# EAGLE board bs_usb_output (EAGLE 9.2.0)
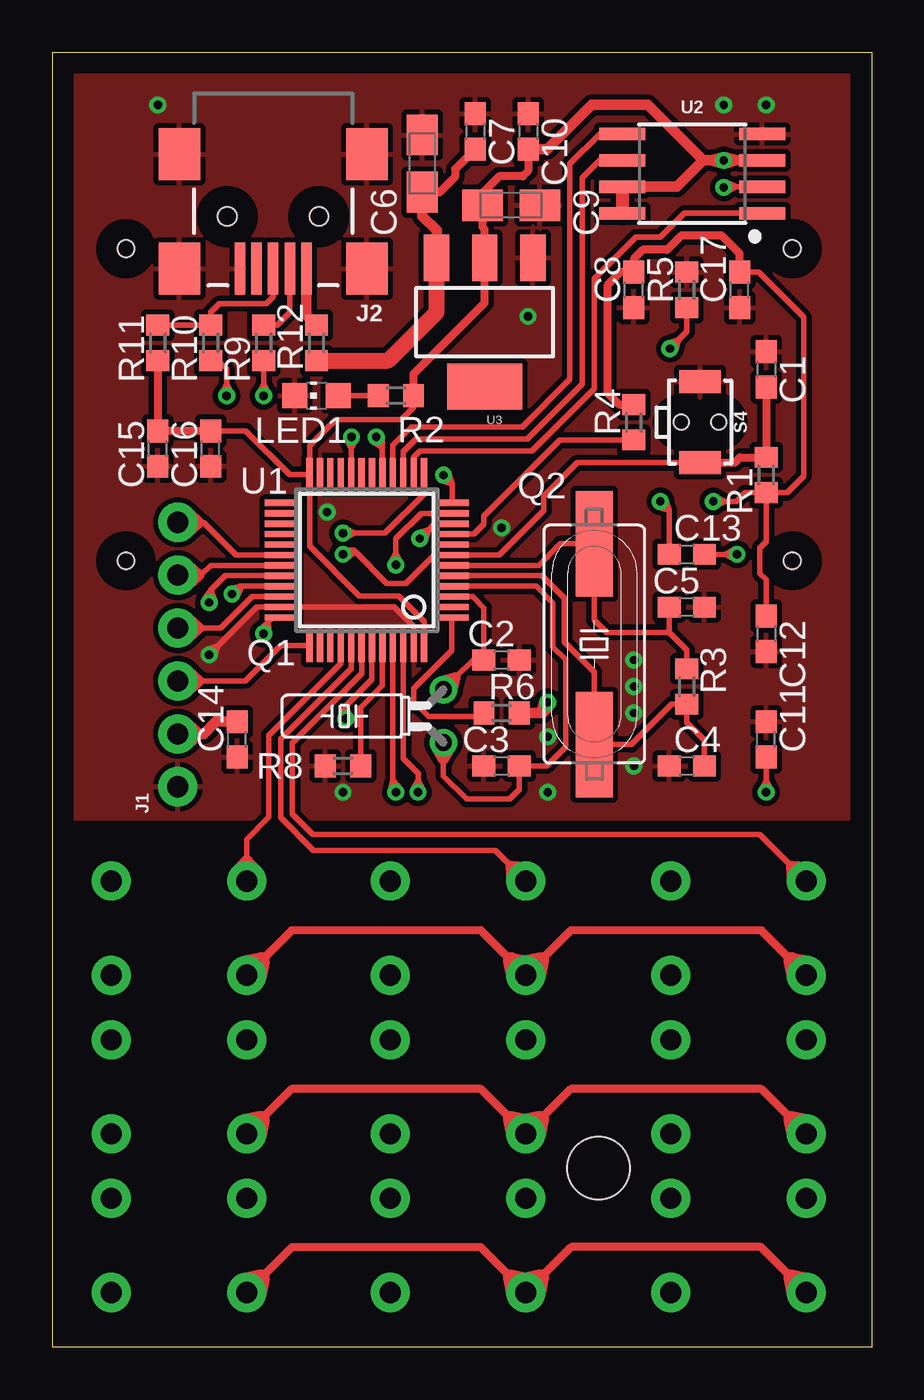
[diagram p0: board, top side]
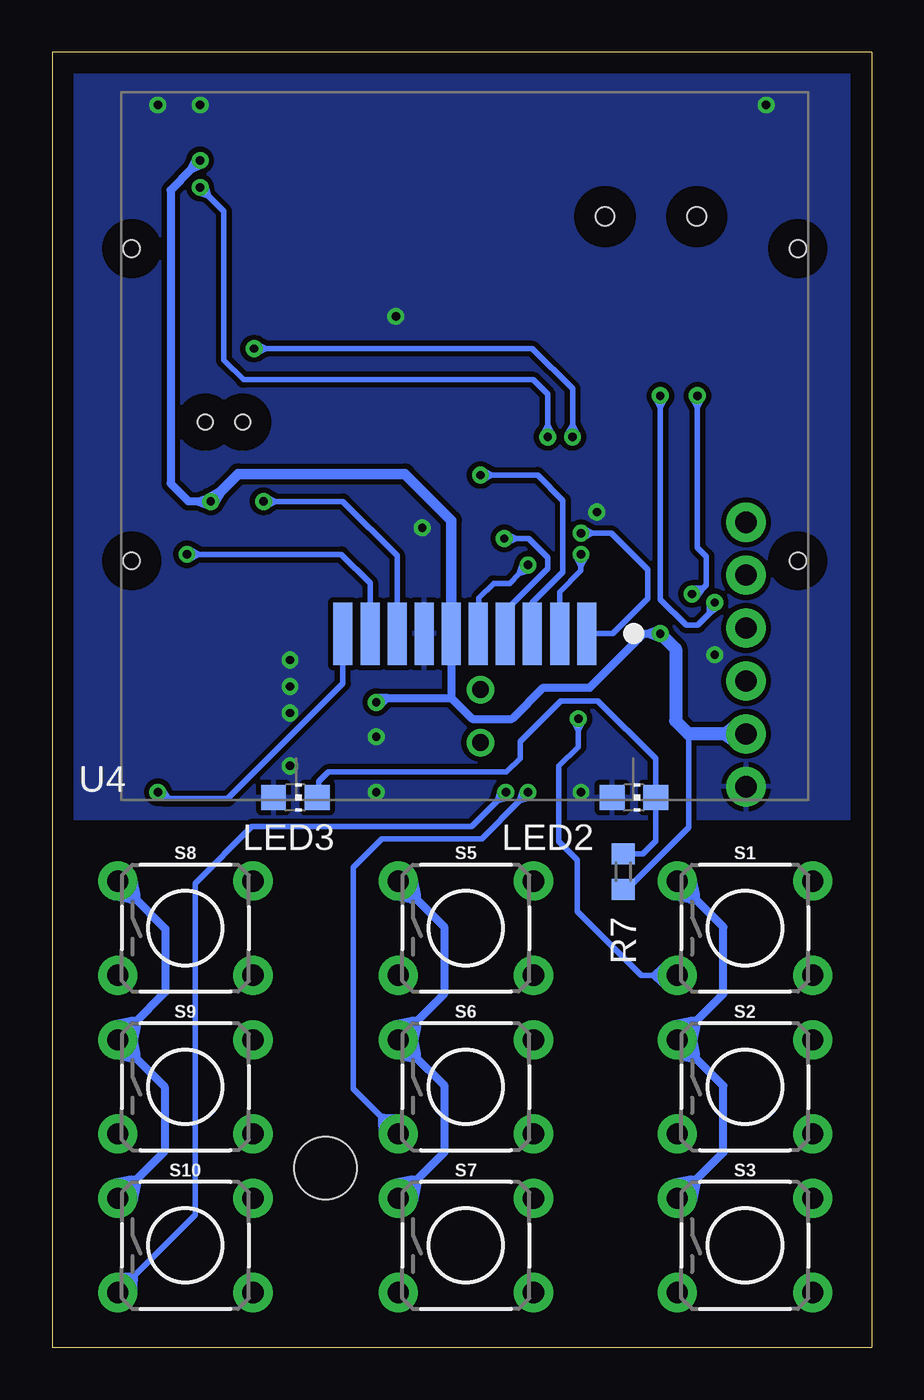
[diagram p1: board, bottom side, seen from below]

Size 39.37 x 62.23 mm. Coordinates in mm from the lower left corner, seen from the top.
Outline: 0,62.23 39.37,62.23 39.37,0 0,0 0,62.23
Copper layers (1*16): Top 0.035mm / dielectric 1.5mm / Bottom 0.035mm
Design rules "default": minimum track width 6mil, minimum drill 0.35mm, track to track 6mil, track to pad 6mil, pad to pad 6mil, via to via 6mil, smd to smd 6mil, copper to edge 40mil, drill to drill 6mil, minimum pad ring 10mil, minimum via ring 8mil, stop-mask expansion 4mil, vias tented up to drill 0mil, thermal gap 10mil
Holes 3 mm at 26.24,8.61

## Footprints (pad centres in the part's own frame; a part is rotated, then mirrored left to right if it is on the bottom)
C0603 = smd 1.1 x 1: 1 -0.85,0; 2 0.85,0
A/3216-18R = smd 1.95 x 1.5: + 1.375,0; - -1.375,0
1X06_NO_SILK = drill 1.016 pad 1.88: 1 0,0; 2 2.54,0; 3 5.08,0; 4 7.62,0; 5 10.16,0; 6 12.7,0
USB-MINIB = smd 2.5 x 0.5: D+ 2.5,0; D- 2.5,0.8; GND 2.5,-1.6; ID 2.5,-0.8; VBUS 2.5,1.6 | smd 2.5 x 2: S1 -3,4.5; S2 2.5,4.5; S3 -3,-4.5; S4 2.5,-4.5 | hole 0.9: 0,2.2; 0,-2.2
CHIP-LED0805 = smd 1.2 x 1.2: A 0,-1.05; C 0,1.05
TC26H = drill 0.813: 1 -1.27,0; 2 1.27,0
SM49 = smd 5.08 x 1.778: 1 -4.826,0; 2 4.826,0
R0603 = smd 1 x 1.1: 1 -0.85,0; 2 0.85,0
TACTILE_SWITCH_PTH_6.0MM = drill 1.016 pad 1.88: 1 -3.251,2.261; 2 3.251,2.261; 3 -3.251,-2.261; 4 3.251,-2.261
TACTILE_SWITCH_SMD_RIGHT_ANGLE = smd 1.1 x 2: 1 -1.95,0; 2 1.95,0 | hole 0.7: 0,0.9; 0,-0.9
TQFP48_7X7 = smd 0.3 x 1.6: 1 -2.75,-4.1; 2 -2.25,-4.1; 3 -1.75,-4.1; 4 -1.25,-4.1; 5 -0.75,-4.1; 6 -0.25,-4.1; 7 0.25,-4.1; 8 0.75,-4.1; 9 1.25,-4.1; 10 1.75,-4.1; 11 2.25,-4.1; 12 2.75,-4.1; 25 2.75,4.1; 26 2.25,4.1; 27 1.75,4.1; 28 1.25,4.1; 29 0.75,4.1; 30 0.25,4.1; 31 -0.25,4.1; 32 -0.75,4.1; 33 -1.25,4.1; 34 -1.75,4.1; 35 -2.25,4.1; 36 -2.75,4.1 | smd 1.6 x 0.3: 13 4.1,-2.75; 14 4.1,-2.25; 15 4.1,-1.75; 16 4.1,-1.25; 17 4.1,-0.75; 18 4.1,-0.25; 19 4.1,0.25; 20 4.1,0.75; 21 4.1,1.25; 22 4.1,1.75; 23 4.1,2.25; 24 4.1,2.75; 37 -4.1,2.75; 38 -4.1,2.25; 39 -4.1,1.75; 40 -4.1,1.25; 41 -4.1,0.75; 42 -4.1,0.25; 43 -4.1,-0.25; 44 -4.1,-0.75; 45 -4.1,-1.25; 46 -4.1,-1.75; 47 -4.1,-2.25; 48 -4.1,-2.75
SO08-EIAJ = smd 0.61 x 2.21: 1 -1.905,-3.378; 2 -0.635,-3.378; 3 0.635,-3.378; 4 1.905,-3.378; 5 1.905,3.353; 6 0.635,3.353; 7 -0.635,3.353; 8 -1.905,3.353
SOT223 = smd 1.219 x 2.235: 1 -2.311,-3.099; 2 0,-3.099; 3 2.311,-3.099 | smd 3.6 x 2.2: 4 0,3.099
HEM12864 = smd 0.914 x 2.997: 1 11.7,0; 2 10.4,0; 3 9.1,0; 4 7.8,0; 5 6.5,0; 6 5.2,0; 7 3.9,0; 8 2.6,0; 9 1.3,0; 10 0,0 | hole 0.8: -10.15,18.5; -10.15,3.5; 21.85,18.5; 21.85,3.5

## Placement (x,y rotation side)
C1  104  [C0603]  34.29,46.99 270 top
C2  15pF  [C0603]  21.59,33.02 180 top
C3  15pF  [C0603]  21.59,27.94 0 top
C4  22pF  [C0603]  30.48,27.94 0 top
C5  22pF  [C0603]  30.48,35.56 180 top
C6  10uF  [A/3216-18R]  17.78,56.87 270 top
C7  104  [C0603]  20.32,58.42 270 top
C8  104  [C0603]  27.94,50.8 90 top
C9  10uF  [A/3216-18R]  22.05,54.86 180 top
C10  104  [C0603]  22.86,58.42 270 top
C11  104  [C0603]  34.29,29.21 90 top
C12  104  [C0603]  34.29,34.29 270 top
C13  104  [C0603]  30.48,38.1 0 top
C14  104  [C0603]  8.89,29.21 90 top
C15  104  [C0603]  5.08,43.18 90 top
C16  104  [C0603]  7.62,43.18 90 top
C17  104  [C0603]  33.02,50.8 90 top
J1  DEBUG  [1X06_NO_SILK]  6.04,26.94 90 top
J2  USB_MINI-B_SMT  [USB-MINIB]  10.62,54.33 270 top
LED1  POWER  [CHIP-LED0805]  12.7,45.72 90 top
LED2  POWER  [CHIP-LED0805]  11.43,26.42 270 bottom
LED3  POWER  [CHIP-LED0805]  27.69,26.42 270 bottom
Q1  32.768K  [TC26H]  18.8,30.33 90 top
Q2  8M  [SM49]  26.04,33.78 270 top
R1  10K  [R0603]  34.29,41.91 90 top
R2  518  [R0603]  16.51,45.72 180 top
R3  1M  [R0603]  30.48,31.75 270 top
R4  0  [R0603]  27.94,44.45 90 top
R5  10K  [R0603]  30.48,50.8 90 top
R6  0  [R0603]  21.59,30.48 0 top
R7  1K  [R0603]  11.94,22.86 90 bottom
R8  10K  [R0603]  13.97,27.94 180 top
R9  22  [R0603]  10.16,48.26 90 top
R10  22  [R0603]  7.62,48.26 90 top
R11  1.5K  [R0603]  5.08,48.26 90 top
R12  500mA  [R0603]  12.7,48.26 270 top
S1  MOMENTARY-SWITCH-SPST-PTH-6.0MM  [TACTILE_SWITCH_PTH_6.0MM]  6.1,20.14 0 bottom
S2  MOMENTARY-SWITCH-SPST-PTH-6.0MM  [TACTILE_SWITCH_PTH_6.0MM]  6.1,12.52 0 bottom
S3  MOMENTARY-SWITCH-SPST-PTH-6.0MM  [TACTILE_SWITCH_PTH_6.0MM]  6.1,4.9 0 bottom
S4  MOMENTARY-SWITCH-SPST-SMD-RIGHT-ANGLE  [TACTILE_SWITCH_SMD_RIGHT_ANGLE]  31.11,44.45 270 top
S5  MOMENTARY-SWITCH-SPST-PTH-6.0MM  [TACTILE_SWITCH_PTH_6.0MM]  19.5,20.14 0 bottom
S6  MOMENTARY-SWITCH-SPST-PTH-6.0MM  [TACTILE_SWITCH_PTH_6.0MM]  19.5,12.52 0 bottom
S7  MOMENTARY-SWITCH-SPST-PTH-6.0MM  [TACTILE_SWITCH_PTH_6.0MM]  19.5,4.9 0 bottom
S8  MOMENTARY-SWITCH-SPST-PTH-6.0MM  [TACTILE_SWITCH_PTH_6.0MM]  32.97,20.14 0 bottom
S9  MOMENTARY-SWITCH-SPST-PTH-6.0MM  [TACTILE_SWITCH_PTH_6.0MM]  32.97,12.52 0 bottom
S10  MOMENTARY-SWITCH-SPST-PTH-6.0MM  [TACTILE_SWITCH_PTH_6.0MM]  32.97,4.9 0 bottom
U1  STM32F103C8T6STM32F103C8T6_L  [TQFP48_7X7]  15.11,37.82 90 top
U2  25F32006WSOI  [SO08-EIAJ]  30.73,56.39 90 top
U3  1117  [SOT223]  20.78,49.25 180 top
U4  HEM12864  [HEM12864]  25.4,34.29 0 bottom

## Library data of the parts
C1-C17 = rcl; SPICEPREFIX: C
J1 = SparkFun-Connectors; PROD_ID: CONN-08437
J2 = SparkFun-Connectors; PROD_ID: CONN-08193; SF_ID: PRT-00587
LED1-LED3 = led
Q1 Q2 = crystal; OC_FARNELL: unknown; OC_NEWARK: unknown
R1-R12 = rcl; SPICEPREFIX: R
S1-S3 S5-S10 = SparkFun-Switches; PROD_ID: SWCH-08441; SF_SKU: COM-00097
S4 = SparkFun-Switches; PROD_ID: COMP-12265
U1 U4 = bs_usb
U2 = SparkFun-IC-Memory; PROD_ID: IC-09109
U3 = SparkFun-IC-Power; PROD_ID: VREG-08170

## Nets
+3V3: C8.2 C9.+ C10.2 C12.1 C14.2 C15.2 C16.2 C17.2 J1.2 R1.1 R2.1 R4.2 R6.2 R7.1 R11.1 U1.24 U1.36 U1.48 U2.3 U2.7 U2.8 U3.2 U4.6
+5V: C6.+ C7.2 R12.2 U3.3
GND: C1.1 C2.1 C3.1 C4.1 C5.1 C6.- C7.1 C8.1 C9.- C10.1 C11.2 C12.2 C14.1 C15.1 C16.1 C17.1 J1.1 J2.GND J2.S1 J2.S2 J2.S3 J2.S4 LED1.C LED2.A LED3.A R5.2 R8.2 S4.1 U1.8 U1.23 U1.35 U1.47 U2.4 U3.1 U4.7
N$1: R8.1 U1.44
N$2: R6.1 U1.1
N$3: R5.1 U1.20
N$4: R4.1 U1.9
N$5: C4.2 Q2.2 R3.2 U1.5
N$6: C2.2 Q1.2 U1.3
N$7: C5.2 Q2.1 R3.1 U1.6
N$8: C3.2 Q1.1 U1.4
N$9: J2.D- R9.2
N$10: J2.D+ R10.2 R11.2
N$11: J2.VBUS R12.1
N$12: J1.6 U1.30
N$13: J1.5 U1.31
N$14: C13.1 U4.8
N$15: C13.2 U4.9
N$16: C11.1 U4.10
N$18: LED2.C LED3.C R7.2
N$19: LED1.A R2.2
NRST: C1.2 R1.2 S4.2 U1.7 U4.2
PA0: U1.10 U4.4
PA1: U1.11 U4.5
PA2: U1.12 U4.3
PA3: U1.13 U4.1
PA4: U1.14 U2.1
PA5: U1.15 U2.6
PA6: U1.16 U2.5
PA7: U1.17 U2.2
PA11: R9.1 U1.32
PA12: R10.1 U1.33
PA13: J1.4 U1.34
PA14: J1.3 U1.37
PB4: S1.1 S2.1 S3.1 U1.40
PB5: S5.1 S6.1 S7.1 U1.41
PB6: S8.1 S9.1 S10.1 U1.42
PB7: S1.3 S5.3 S8.3 U1.43
PB8: S2.3 S6.3 S9.3 U1.45
PB9: S3.3 S7.3 S10.3 U1.46

## Tracks (layer width: path | path; a pad name or v marks a point on that pad's centre or on a via)
+3V3  (via drill 0.4)
  Top 0.254: v31.75,40.64 32.35,40.64 | 32.35,40.64 32.87,40.64 33.29,41.06 R1.1 | C16.2 9.31,44.03 11.42,41.92 U1.24 | v10.16,34.29 10.16,34.62 10.39,34.85 | 10.39,34.85 10.61,35.07 U1.36 | C17.2 33.95,51.65 36.09,49.51 36.09,41.86 35.29,41.06 R1.1 | R1.1 34.29,38.71 33.98,38.41 33.98,37.19 34.29,36.88 C12.1 | R2.1 17.36,45.17 16.76,44.58 13.61,44.58 12.36,43.33 U1.24 | U1.48 17.86,34.87 16.64,36.09 14.76,36.09 12.36,38.49 U1.24 | 32.35,40.64 31.88,40.88 v31.75,40.64 | 32.35,40.64 31.88,40.4 v31.75,40.64 | 10.39,34.85 9.98,34.5 v10.16,34.29 | 10.39,34.85 10.43,34.32 v10.16,34.29
  Top 0.381: R2.1 17.36,46.77 20.78,50.19 U3.2 20.78,53.72 20.67,53.83 C9.+ 20.67,55.47 21.46,56.26 22.61,56.26 22.86,56.52 C10.2 | C17.2 33.02,52.55 32.16,53.42 30.23,53.42 29.54,52.73 28.37,52.73 27.94,52.3 C8.2 27.29,51.65 26.67,51.03 26.67,45.87 27.24,45.3 R4.2 | C16.2 C15.2 R11.1
  Top 0.508: J1.2 7.06,29.48 | 7.06,29.48 7.28,29.48 7.86,30.06 C14.2 | C10.2 23.79,57.57 25.91,59.69 28.6,59.69 31.27,57.02 | R6.2 23.48,30.48 | 23.48,30.48 23.57,30.48 23.8,30.71 v23.8,30.99 | U2.7 30,55.75 31.27,57.02 | v32.26,57.02 31.66,57.02 | 31.66,57.02 31.27,57.02 | U2.3 32.86,57.02 | 32.86,57.02 v32.26,57.02 | 31.66,57.02 32.22,56.88 v32.26,57.02 | 31.66,57.02 32.22,57.17 v32.26,57.02 | 32.86,57.02 32.29,57.17 v32.26,57.02 | 32.86,57.02 32.29,56.88 v32.26,57.02 | 23.48,30.48 23.9,30.88 v23.8,30.99 | 23.48,30.48 23.66,31.03 v23.8,30.99 | 7.06,29.48 6.51,29.98 J1.2 | 7.06,29.48 6.51,28.97 J1.2
  Top 0.635: U2.7 U2.8
  Bottom 0.254: R7.1 11.77,22.01 8.8,24.98 8.8,29.48
  Bottom 0.381: v31.75,40.64 32.35,40.64 | 32.35,40.64 32.82,40.64 33.68,41.5 33.68,55.6 32.68,56.6 | U4.6 20.2,31.2 | 20.2,31.2 19.2,30.2 17.27,30.2 15.77,31.7 13.54,31.7 10.95,34.29 10.76,34.29 | 10.76,34.29 v10.16,34.29 | v23.8,30.99 23.59,31.2 23.24,31.2 | 23.24,31.2 20.2,31.2 | v32.26,57.02 32.68,56.6 | 32.35,40.64 31.82,40.84 v31.75,40.64 | 32.35,40.64 31.82,40.44 v31.75,40.64 | 10.76,34.29 10.23,34.49 v10.16,34.29 | 10.76,34.29 10.23,34.09 v10.16,34.29 | 32.68,56.6 32.45,57.11 v32.26,57.02 | 32.68,56.6 32.17,56.83 v32.26,57.02 | 23.24,31.2 23.66,30.83 v23.8,30.99 | 23.24,31.2 23.8,31.2 v23.8,30.99
  Bottom 0.508: 31.33,41.06 30.43,41.96 22.43,41.96 20.2,39.73 U4.6 | 31.33,41.06 v31.75,40.64 | 31.33,41.06 31.62,40.56 v31.75,40.64 | 31.33,41.06 31.83,40.77 v31.75,40.64
  Bottom 0.635: J1.2 7.06,29.48 | 7.06,29.48 8.8,29.48 9.42,30.1 9.42,33.55 v10.16,34.29 | 7.06,29.48 6.42,29.97 J1.2 | 7.06,29.48 6.42,28.99 J1.2
+5V
  Top 0.381: C6.+ 18.62,55.5 19.36,56.24 19.36,56.6 C7.2
  Top 0.508: C6.+ 17.78,54.36 18.47,53.67 U3.3
  Top 0.762: R12.2 16.14,47.41 18.47,49.73 U3.3
GND  (via drill 0.4)
  Top 0.254: U1.47 17.36,34.64 16.43,35.57 U1.35 9.84,35.57 7.97,33.7 | 7.97,33.7 v7.54,33.27 | 7.97,33.7 7.46,33.54 v7.54,33.27 | 7.97,33.7 7.81,33.19 v7.54,33.27
  other vias: 27.94,27.94 13.97,26.67 23.8,29.34 5.08,59.69 32.26,59.69 34.29,59.69 27.94,33.02 27.94,31.75 27.94,30.48 23.8,26.67 22.86,49.53 13.21,40.13 21.59,39.37
  pour Top (isolate 0.254): 0,62.23 0,25.4 39.37,25.4 39.37,62.23
  pour Bottom (isolate 0.254): 0,62.23 0,25.4 39.37,25.4 39.37,62.23
N$1
  Top 0.254: R8.1 14.82,30.75 15.86,31.79 U1.44
N$2
  Top 0.254: R6.1 20.56,30.3 18.09,30.3 17.37,31.01 17.37,31.66 19.2,33.49 U1.1
N$3  (via drill 0.4)
  Top 0.254: R5.1 30.48,48.79 30.09,48.41 | 30.09,48.41 v29.67,47.98 | U1.20 14.36,43.14 | 14.36,43.14 14.36,43.52 v14.38,43.74 | 30.09,48.41 29.58,48.24 v29.67,47.98 | 30.09,48.41 29.93,47.9 v29.67,47.98 | 14.36,43.14 14.62,43.61 v14.38,43.74 | 14.36,43.14 14.13,43.62 v14.38,43.74
  Bottom 0.254: 29.07,47.98 16.31,47.98 14.38,46.05 14.38,44.34 | 29.07,47.98 v29.67,47.98 | v14.38,43.74 14.38,44.34 | 29.07,47.98 29.54,47.73 v29.67,47.98 | 29.07,47.98 29.54,48.23 v29.67,47.98 | 14.38,44.34 14.13,43.87 v14.38,43.74 | 14.38,44.34 14.62,43.87 v14.38,43.74
N$4
  Top 0.254: R4.1 24.38,43.6 20.73,39.95 20.73,39.55 20.25,39.07 U1.9
N$5
  Top 0.254: C4.2 31.33,29.17 30.48,30.02 R3.2 29.76,30.9 27.81,28.96 Q2.2 26.04,32.44 24.59,33.88 24.59,35.99 23.51,37.07 U1.5
N$6
  Top 0.254: U1.3 20.19,36.07 20.74,35.52 C2.2 20.22,33.02 19.37,32.17 Q1.2
  Top 0.508: 19.37,32.17 18.69,31.99 Q1.2 19.19,31.49 19.37,32.17
N$7
  Top 0.254: C5.2 29.63,34.35 | R3.1 30.48,33.5 29.63,34.35 | 29.63,34.35 26.63,34.35 26.04,34.95 Q2.1 24.4,38.61 23.36,37.57 U1.6
N$8
  Top 0.254: U1.4 23.25,36.57 24.05,35.76 24.05,33.65 24.66,33.04 24.66,28.85 23.75,27.94 C3.2 22.44,26.81 21.97,26.34 19.91,26.34 18.8,27.46 18.8,28.25 Q1.1
  Top 0.508: 18.8,28.25 19.15,28.85 Q1.1 18.44,28.85 18.8,28.25
N$9
  Top 0.254: J2.D- 11.42,49.72 10.81,49.11 R9.2
N$10
  Top 0.254: J2.D+ 10.62,50.47 10.29,50.14 8.03,50.14 7.62,49.73 R10.2 R11.2
N$11
  Top 0.508: J2.VBUS 12.22,49.59 R12.1
N$12
  Top 0.254: J1.6 7.06,39.64 7.28,39.64 8.84,38.07 U1.30
  Top 0.508: 7.06,39.64 6.51,40.14 J1.6 6.51,39.13 7.06,39.64
N$13
  Top 0.254: J1.5 7.06,37.1 7.15,37.1 7.62,37.57 U1.31
  Top 0.508: 7.06,37.1 6.51,37.6 J1.5 6.51,36.59 7.06,37.1
N$14  (via drill 0.4)
  Top 0.254: C13.1 29.63,40.21 | 29.63,40.21 29.63,40.22 v29.21,40.64 | 29.63,40.21 29.47,40.72 v29.21,40.64 | 29.63,40.21 29.12,40.38 v29.21,40.64
  Bottom 0.254: v29.21,40.64 28.61,40.64 | 28.61,40.64 25.4,40.64 22.8,38.04 U4.8 | 28.61,40.64 29.08,40.4 v29.21,40.64 | 28.61,40.64 29.08,40.88 v29.21,40.64
N$15  (via drill 0.4)
  Top 0.254: C13.2 32.29,38.1 | 32.29,38.1 v32.89,38.1 | 32.29,38.1 32.77,37.85 v32.89,38.1 | 32.29,38.1 32.77,38.34 v32.89,38.1
  Bottom 0.254: v32.89,38.1 32.29,38.1 | 32.29,38.1 25.48,38.1 24.1,36.72 U4.9 | 32.29,38.1 32.77,37.85 v32.89,38.1 | 32.29,38.1 32.77,38.34 v32.89,38.1
N$16  (via drill 0.4)
  Top 0.254: C11.1 34.29,27.27 | 34.29,27.27 v34.29,26.67 | 34.29,27.27 34.04,26.8 v34.29,26.67 | 34.29,27.27 34.53,26.8 v34.29,26.67
  Bottom 0.254: v34.29,26.67 33.98,26.36 33.77,26.36 | 33.77,26.36 30.94,26.36 25.4,31.9 U4.10 | 33.77,26.36 34.3,26.39 v34.29,26.67 | 33.77,26.36 34.06,26.82 v34.29,26.67
N$18
  Bottom 0.254: LED3.C 26.57,26.48 26.57,27.18 26.11,27.64 17.55,27.64 16.89,28.3 16.89,29.11 14.94,31.06 13.16,31.06 10.38,28.29 LED2.C 10.38,24.34 11.01,23.71 R7.2
N$19
  Top 0.254: R2.2 LED1.A
NRST  (via drill 0.4)
  Top 0.254: S4.2 25.23,42.5 23.62,40.89 23.62,40.21 21.48,38.07 U1.7 18.36,38.07 16.99,36.7 16.08,36.7 14.56,38.22 | 14.56,38.22 14.48,38.3 14.17,38.3 v13.97,38.1 | 14.56,38.22 14.04,38.37 v13.97,38.1 | 14.56,38.22 14.14,37.89 v13.97,38.1
  Top 0.381: C1.2 R1.2 33.03,42.76 32.77,42.5 S4.2
  Bottom 0.254: U4.2 15,36.28 13.97,37.31 13.97,37.5 | v13.97,38.1 13.97,37.5 | 13.97,37.5 14.21,37.97 v13.97,38.1 | 13.97,37.5 13.72,37.97 v13.97,38.1
PA0  (via drill 0.4)
  Top 0.254: U1.10 18.36,39.57 18.08,39.29 | 18.08,39.29 v17.65,38.86 | 18.08,39.29 17.57,39.12 v17.65,38.86 | 18.08,39.29 17.92,38.78 v17.65,38.86
  Bottom 0.254: U4.4 17.6,35.38 15.57,37.41 15.57,37.95 16.49,38.86 17.05,38.86 | 17.05,38.86 v17.65,38.86 | 17.05,38.86 17.53,38.62 v17.65,38.86 | 17.05,38.86 17.53,39.11 v17.65,38.86
PA1  (via drill 0.4)
  Top 0.254: 16.51,38.19 16.51,38.86 17.72,40.07 U1.11 | 16.51,38.19 v16.51,37.59 | 16.51,38.19 16.27,37.72 v16.51,37.59 | 16.51,38.19 16.76,37.72 v16.51,37.59
  Bottom 0.254: v16.51,37.59 16.93,37.17 | 16.93,37.17 17.4,36.7 18.16,36.7 18.87,35.99 18.87,34.32 U4.5 | 16.93,37.17 16.77,37.67 v16.51,37.59 | 16.93,37.17 16.43,37.33 v16.51,37.59
PA2  (via drill 0.4)
  Top 0.254: U1.12 19.21,41.48 | 19.21,41.48 19.21,41.49 v18.8,41.91 | 19.21,41.48 19.06,41.99 v18.8,41.91 | 19.21,41.48 18.71,41.65 v18.8,41.91
  Bottom 0.254: U4.3 16.3,35.8 14.84,37.26 14.84,40.69 16.05,41.91 18.2,41.91 | v18.8,41.91 18.2,41.91 | 18.2,41.91 18.67,41.66 v18.8,41.91 | 18.2,41.91 18.67,42.16 v18.8,41.91
PA3  (via drill 0.4)
  Top 0.254: U1.13 17.86,41 15.98,39.12 14.57,39.12 | v13.97,39.12 14.57,39.12 | 14.57,39.12 14.1,39.36 v13.97,39.12 | 14.57,39.12 14.1,38.87 v13.97,39.12
  Bottom 0.254: U4.1 12.45,34.29 10.77,35.97 10.77,37.36 12.52,39.12 13.37,39.12 | v13.97,39.12 13.37,39.12 | 13.37,39.12 13.84,38.87 v13.97,39.12 | 13.37,39.12 13.84,39.36 v13.97,39.12
PA4
  Top 0.254: U1.14 17.36,42.77 17.65,43.05 23.03,43.05 26.04,46.06 26.04,51.33 28.04,53.34 29.21,53.34 30.35,54.48 U2.1
PA5
  Top 0.254: U1.15 16.86,43.05 17.46,43.64 22.81,43.64 25.45,46.28 25.45,56.19 26.29,57.02 U2.6
PA6
  Top 0.254: U1.16 16.36,43.34 17.25,44.22 22.58,44.22 24.87,46.51 24.87,56.87 26.29,58.29 U2.5
PA7  (via drill 0.4)
  Top 0.254: v15.57,43.74 15.87,43.44 15.86,43.43 15.86,43.22 | U1.17 15.86,43.22 | U2.2 32.86,55.75 | 32.86,55.75 32.28,55.75 v32.26,55.73 | 15.86,43.22 15.85,43.75 v15.57,43.74 | 15.86,43.22 15.42,43.51 v15.57,43.74 | 32.86,55.75 32.38,55.98 v32.26,55.73 | 32.86,55.75 32.39,55.49 v32.26,55.73
  Bottom 0.254: v15.57,43.74 15.57,44.34 | 15.57,44.34 15.57,45.8 16.26,46.48 30.18,46.48 31.11,47.42 31.11,54.59 31.83,55.3 | v32.26,55.73 31.83,55.3 | 15.57,44.34 15.33,43.87 v15.57,43.74 | 15.57,44.34 15.81,43.87 v15.57,43.74 | 31.83,55.3 32.34,55.46 v32.26,55.73 | 31.83,55.3 32,55.81 v32.26,55.73
PA11  (via drill 0.4)
  Top 0.254: R9.1 10.16,46.32 | 10.16,46.32 v10.16,45.72 | v7.54,35.79 7.54,36.3 7.63,36.38 | 7.63,36.38 8.32,37.07 U1.32 | 10.16,46.32 9.91,45.85 v10.16,45.72 | 10.16,46.32 10.4,45.85 v10.16,45.72 | 7.63,36.38 7.32,35.95 v7.54,35.79 | 7.63,36.38 7.8,35.88 v7.54,35.79
  Bottom 0.254: v10.16,45.72 10.16,45.12 | 10.16,45.12 10.16,35.94 8.91,34.7 8.36,34.7 7.8,35.25 | 7.8,35.25 7.54,35.51 v7.54,35.79 | 10.16,45.12 10.4,45.59 v10.16,45.72 | 10.16,45.12 9.91,45.59 v10.16,45.72 | 7.8,35.25 7.82,35.78 v7.54,35.79 | 7.8,35.25 7.38,35.57 v7.54,35.79
PA12  (via drill 0.4)
  Top 0.254: v8.64,36.2 9.01,36.57 9.1,36.57 | 9.1,36.57 U1.33 | R10.1 7.99,47.41 8.38,47.02 8.38,46.32 | 8.38,46.32 v8.38,45.72 | 8.38,46.32 8.14,45.85 v8.38,45.72 | 8.38,46.32 8.63,45.85 v8.38,45.72 | 9.1,36.57 8.58,36.47 v8.64,36.2 | 9.1,36.57 8.89,36.08 v8.64,36.2
  Bottom 0.254: v8.64,36.2 8.38,36.2 8.1,36.47 | 8.1,36.47 7.95,36.63 7.95,38 8.38,38.43 8.38,45.12 | v8.38,45.72 8.38,45.12 | 8.38,45.12 8.63,45.59 v8.38,45.72 | 8.38,45.12 8.14,45.59 v8.38,45.72 | 8.1,36.47 8.41,36.04 v8.64,36.2 | 8.1,36.47 8.64,36.47 v8.64,36.2
PA13
  Top 0.254: U1.34 9.6,36.07 8.09,34.56 7.06,34.56 J1.4
  Top 0.508: 7.06,34.56 6.51,35.06 J1.4 6.51,34.05 7.06,34.56
PA14
  Top 0.254: J1.3 7.06,32.02 9.29,32.02 10.99,33.72 U1.37
  Top 0.508: 7.06,32.02 6.51,32.52 J1.3 6.51,31.51 7.06,32.02
PB4
  Top 0.254: S1.1 9.35,23.42 9.35,24.41 10.41,25.48 10.41,29.4 13.86,32.85 U1.40
  Top 0.508: 9.35,23.42 8.84,22.87 S1.1 9.85,22.87 9.35,23.42
  Bottom 0.381: S1.1 8.63,21.68 7.14,20.19 7.14,16.99 8.63,15.5 S2.1 8.63,14.06 7.14,12.57 7.14,9.37 8.63,7.88 S3.1
  Bottom 0.762: S2.1 8.8,14.67 8.63,15.5 9.46,15.33 S2.1 | S2.1 9.46,14.23 8.63,14.06 8.8,14.89 S2.1 | 8.63,21.68 9.46,21.86 S1.1 8.8,22.52 8.63,21.68 | 8.63,7.88 8.8,7.05 S3.1 9.46,7.71 8.63,7.88
PB5
  Top 0.254: S5.1 22.03,23.12 21.28,23.88 12.55,23.88 10.97,25.45 10.97,29.26 11.01,29.26 14.36,32.61 U1.41
  Top 0.508: 22.03,23.12 22.07,22.37 S5.1 22.78,23.09 22.03,23.12
  Bottom 0.381: S5.1 22.03,21.68 20.52,20.18 20.52,17.01 22.03,15.5 S6.1 22.03,14.06 20.52,12.56 20.52,9.39 22.03,7.88 S7.1
  Bottom 0.762: S6.1 22.2,14.67 22.03,15.5 22.86,15.33 S6.1 | S6.1 22.86,14.23 22.03,14.06 22.2,14.89 S6.1 | 22.03,7.88 22.2,7.05 S7.1 22.86,7.71 22.03,7.88 | 22.03,21.68 22.86,21.86 S5.1 22.2,22.52 22.03,21.68
PB6
  Top 0.254: U1.42 14.86,32.36 11.53,29.03 11.53,25.63 12.52,24.64 33.98,24.64 35.5,23.12 S8.1
  Top 0.508: 35.5,23.12 35.53,22.37 S8.1 36.25,23.09 35.5,23.12
  Bottom 0.381: S8.1 35.5,21.68 33.93,20.12 33.93,17.07 35.5,15.5 S9.1 35.5,14.06 33.96,12.52 33.96,9.42 35.5,7.88 S10.1
  Bottom 0.762: S9.1 35.67,14.67 35.5,15.5 36.33,15.33 S9.1 | S9.1 36.33,14.23 35.5,14.06 35.67,14.89 S9.1 | 35.5,21.68 36.33,21.86 S8.1 35.67,22.52 35.5,21.68 | 35.5,7.88 35.67,7.05 S10.1 36.33,7.71 35.5,7.88
PB7  (via drill 0.4)
  Top 0.254: U1.43 15.36,32.08 14.1,30.81 14.1,30.8 | 14.1,30.8 v14.1,30.2 | 14.1,30.8 13.85,30.33 v14.1,30.2 | 14.1,30.8 14.34,30.33 v14.1,30.2
  Top 0.381: S1.3 10.07,18.6 11.51,20.04 20.59,20.04 22.03,18.6 S5.3 23.47,18.6 24.91,20.04 34.06,20.04 35.5,18.6 S8.3
  Top 0.762: S5.3 22.64,18.43 23.47,18.6 23.3,17.77 S5.3 | S5.3 22.2,17.77 22.03,18.6 22.86,18.43 S5.3 | 10.07,18.6 9.23,18.43 S1.3 9.89,17.77 10.07,18.6 | 35.5,18.6 35.67,17.77 S8.3 36.33,18.43 35.5,18.6
  Bottom 0.254: v14.1,30.2 14.1,29.6 | 14.1,29.6 14.1,28.85 15.03,27.92 15.03,24.3 14.15,23.42 14.15,20.95 11.07,17.88 10.36,17.88 S1.3 | 14.1,29.6 14.34,30.07 v14.1,30.2 | 14.1,29.6 13.85,30.07 v14.1,30.2
  Bottom 0.508: 10.36,17.88 9.81,18.39 S1.3 9.81,17.38 10.36,17.88
PB8  (via drill 0.4)
  Top 0.254: U1.45 16.36,27.25 | 16.36,27.25 16.36,26.82 v16.51,26.67 | 16.36,27.25 16.24,26.73 v16.51,26.67 | 16.36,27.25 16.72,26.85 v16.51,26.67
  Top 0.381: S2.3 10.07,10.98 11.51,12.42 20.59,12.42 22.03,10.98 S6.3 23.47,10.98 24.91,12.42 34.06,12.42 35.5,10.98 S9.3
  Top 0.762: S6.3 22.2,10.15 22.03,10.98 22.86,10.81 S6.3 | S6.3 22.64,10.81 23.47,10.98 23.3,10.15 S6.3 | 10.07,10.98 9.23,10.81 S2.3 9.89,10.15 10.07,10.98 | 35.5,10.98 35.67,10.15 S9.3 36.33,10.81 35.5,10.98
  Bottom 0.254: S6.3 23.47,10.98 24.92,12.43 24.92,23.06 23.55,24.43 18.75,24.43 16.93,26.25 | 16.93,26.25 v16.51,26.67 | 16.93,26.25 16.77,26.75 v16.51,26.67 | 16.93,26.25 16.43,26.41 v16.51,26.67
  Bottom 0.508: 23.47,10.98 22.72,10.95 S6.3 23.44,10.23 23.47,10.98
PB9  (via drill 0.4)
  Top 0.254: 17.58,27.27 17.58,27.58 16.86,28.3 U1.46 | 17.58,27.27 v17.58,26.67 | 17.58,27.27 17.33,26.8 v17.58,26.67 | 17.58,27.27 17.82,26.8 v17.58,26.67
  Top 0.381: S3.3 10.07,3.36 11.53,4.83 20.57,4.83 22.03,3.36 S7.3 23.47,3.36 24.94,4.83 34.04,4.83 35.5,3.36 S10.3
  Top 0.762: S7.3 22.64,3.19 23.47,3.36 23.3,2.53 S7.3 | S7.3 22.2,2.53 22.03,3.36 22.86,3.19 S7.3 | 10.07,3.36 9.23,3.19 S3.3 9.89,2.53 10.07,3.36 | 35.5,3.36 35.67,2.53 S10.3 36.33,3.19 35.5,3.36
  Bottom 0.254: S10.3 35.5,3.36 32.49,6.38 32.49,22.3 29.77,25.02 19.23,25.02 18,26.25 | 18,26.25 v17.58,26.67 | 18,26.25 17.84,26.75 v17.58,26.67 | 18,26.25 17.49,26.41 v17.58,26.67
  Bottom 0.508: 35.5,3.36 35.53,2.61 S10.3 36.25,3.33 35.5,3.36